# Altium PCB Monitor_Board.PcbDoc (part 4 of 5)
Units mil, origin at the board's own origin, x right, y up, seen from the top; angles counter-clockwise.
Board outline 3921.03 x 2556.03 mil, 4 copper layers (Top Layer, GND02, PWR03, Bottom Layer), stack 23.756 mil thick; 93 components, 142 nets, 522 pads, 264 vias.
Unrouted connection lines stored in the file: 39.
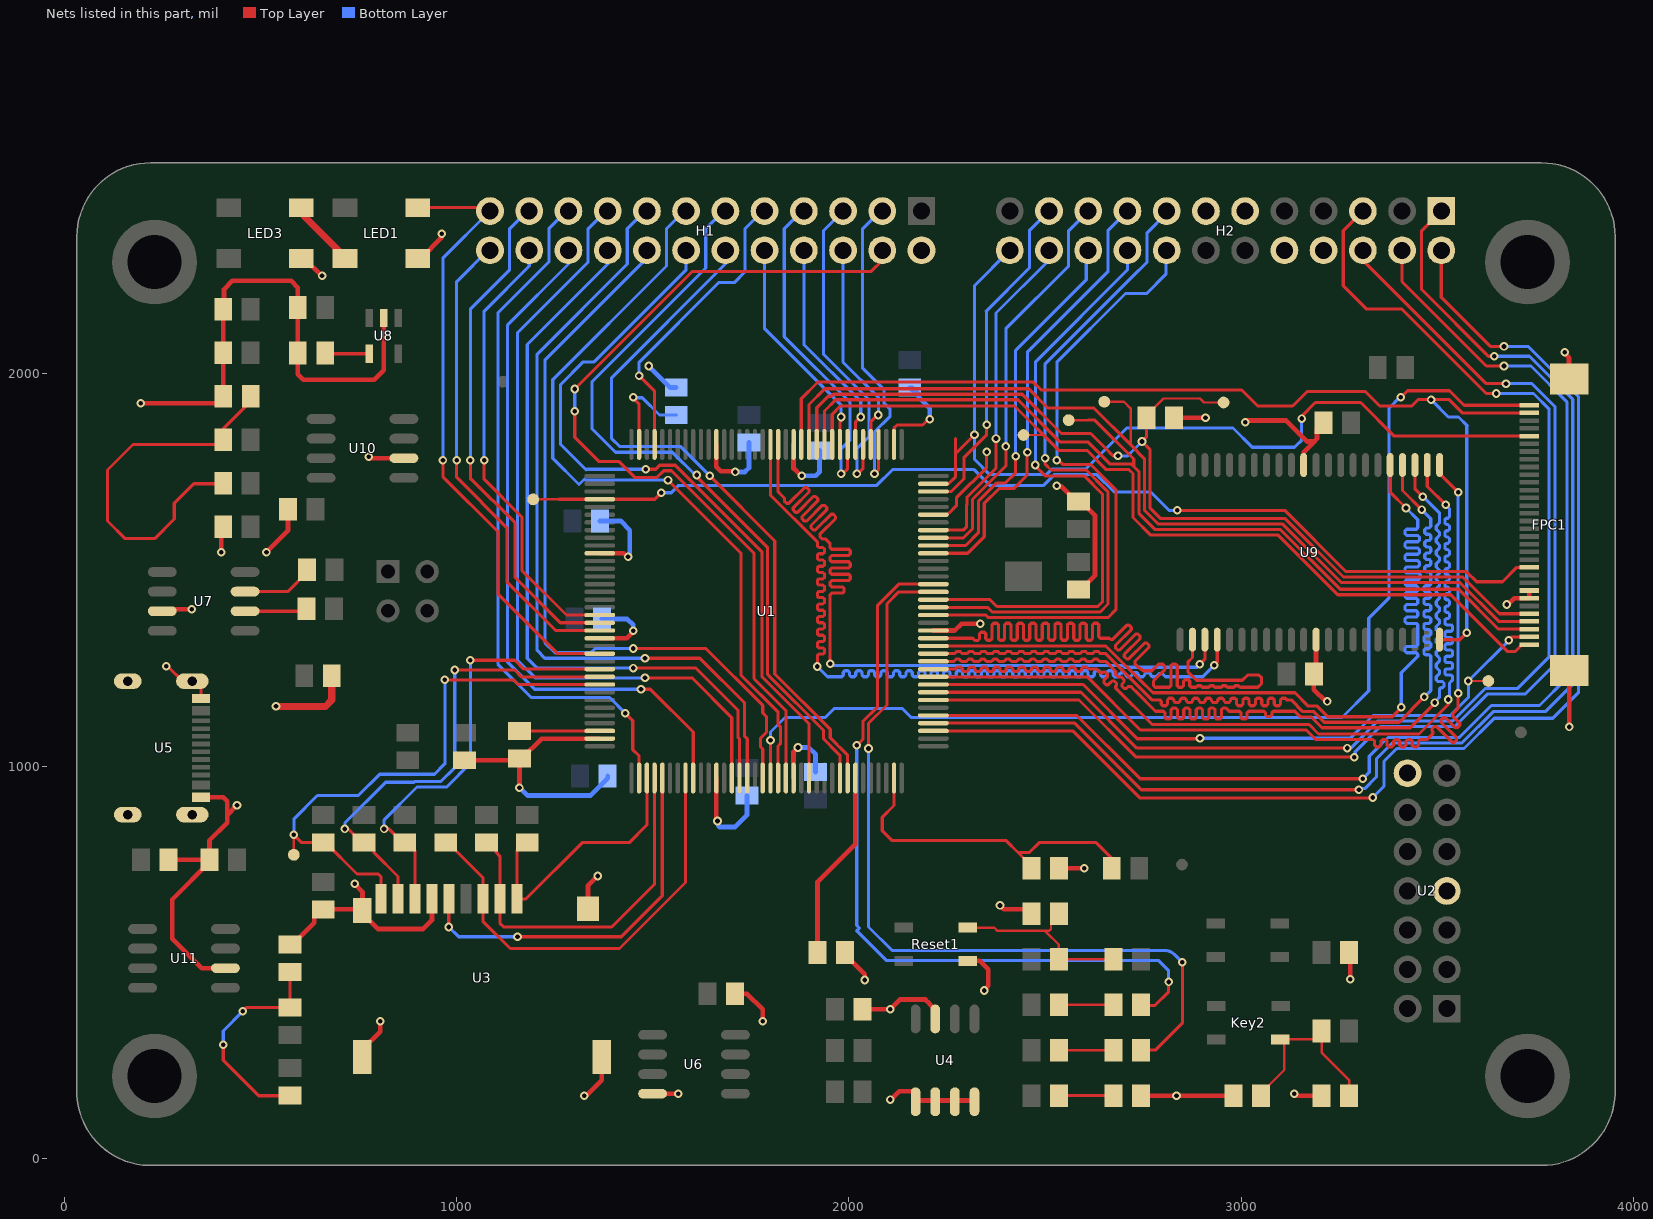
[diagram p5: the nets of this part, all layers, seen from the top]

## Via types
v1: diameter 22, hole 12, Top Layer to Bottom Layer, tented both sides, 259 vias
v2: diameter 45, hole 25, Top Layer to Bottom Layer, tented both sides, 4 vias
v3: diameter 22/22 (per signal layer), hole 12, Top Layer to Bottom Layer, tented both sides, 1 vias

## Nets (pads, with @x,y where several pads share a name; then routed paths per layer and width w, separated by ;. In a path a pad name is that pad's centre, name@x,y a point inside that pad or via, vN(x,y) a via of type N, cw(c..) or ccw(c..) an arc to the next point about the centre after c; other vN are vias at no path point) (continued)
GND: C1.1 C2.1 C3.2 C4.1 C5.2 C6.2 C7.1 C8.2 C9.1 C10.2 C11.2 C12.1 C13.1 C14.1 C15.1 C16.1 C17.1 C18.2 C19.1 C22.1 C23.1 C24.1 C25.1 C26.1 C27.1 C28.1 C29.2 C30.2 C31.1 C32.1 C33.1 D3.K FPC1.7 FPC1.8 FPC1.33 FPC1.34 H1.12 H2.8 H2.9 H2.18 H2.19 LED1.3 LED3.3 R2.2 R3.1 R4.1 R18.2 R22.1 Reset1.4 U1.16 U1.31 U1.38 U1.51 U1.61 U1.83 U1.94 U1.107 U1.120 U1.130 U2.7 U2.14 U3.6 U3.10 U3.11 U3.12 U3.13 U4.1 U4.2 U4.3 U4.4 U4.7 U5.1 U5.2 U5.3 U5.4 U5.A1-B12 U5.B1-A12 U6.4 U7.3 U8.2 U9.12 U9.34 U10.2 U11.2 | length 9278.5
  Top Layer w8: v1(260,1255) 263.02,1255 301.49,1216.53 U5.1@326.17,1216.53 333.91,1216.53 348.41,1202.04 U5.A1-B12@348.41,1172.45 ; U1.38@2114.8,1854.88 U1.38@2114.8,1820.2 2115.38,1820.78 2115.38,1862.38 2122.57,1869.57 2187.78,1869.57 2202.21,1884 v1(2206,1884) ; U1.31@2215.2,1641.06 2249.88,1641.06 2254.05,1645.24 2255.48,1645.24 2273.74,1663.5 2273.74,1683.74 2351,1761 v1(2351,1801)
  Top Layer w12: v1(195,1925) 400,1925 405,1930 C32.1@405,1943 405,2049.92 C22.1@404.92,2050 ; U7.3@249.39,1395 254.39,1400 v1(325,1400) ; C33.1@265,761.1 C30.2@369.96,761.1 369.96,811.06 415,856.1 415,875 ; U5.B1-A12@348.41,920.47 404.53,920.47 415,910 415,875 ; U5.A1-B12@365.26,1175.49 U5.A1-B12@365.75,1175.99 ; C30.2@374.7,765.85 374.7,759.74 275,660.04 275,560 350,485 U11.2@410.61,485 ; C17.1@399.96,1610 399.96,1555.04 400,1555 v1(400,1545) ; C22.1@404.92,2054 C31.1@404.92,2165 407,2167.08 407,2216 428,2237 578,2237 595,2220 C23.1@595,2169 594.92,2168.92 C24.1@594.92,2053 594.92,1999.08 609,1985 790,1985 814.09,2009.09 U8.2@814.09,2142.09 ; v1(440,900) 415,875 ; v1(515,1545) 569.92,1599.92 C29.2@569.92,1655 ; C28.1@575,545.08 581.1,545.08 637.06,601.04 637.06,618.09 653.9,634.92 C15.1@660,634.92 757.21,634.92 U3.10@759.89,632.24 ; LED3.3@604,2294.03 611.87,2294.03 655.91,2250 v1(657,2250) ; v1(740,700) 759.89,680.11 U3.10@759.89,632.24 ; U3.11@759.89,258.22 759.89,277.91 805,323.03 v1(805,350) ; v1(776.25,1788.75) 780,1785 U10.2@865.61,1785 ; LED1.3@900.52,2294.03 908.39,2294.03 962,2347.64 v1(962,2357) ; U3.6@937.05,661.78 937.05,607.05 915,585 799.26,585 759.89,624.37 U3.10@759.89,632.24 ; C19.1@1020,1015 1155.08,1015 C3.2@1160,1019.92 ; v1(1160,945) C3.2@1160,1019.92 ; v1(1325,160) 1330.23,160 1370.11,199.88 U3.12@1370.11,258.22 ; U1.107@1328.12,1069.62 1364.22,1069.62 U1.107@1364.8,1070.2 1216.38,1070.2 1166.1,1019.92 C3.2@1160,1019.92 ; U3.13@1334.68,636.18 1334.68,694.68 v1(1360,720) ; U1.94@1364.8,1326.1 1433.9,1326.1 1450,1342.2 v1(1450,1345) ; U1.83@1364.8,1542.64 1425.65,1542.64 1434.29,1534 v1(1437,1534) ; U6.4@1471.14,165 v1(1565,165) ; U1.120@1662.05,969.8 1662.05,862.95 v1(1665,860) ; U1.61@1662.05,1820.2 1662.05,1762.95 1673.09,1751.91 1708.09,1751.91 v1(1710,1750) ; C18.2@1710,420 1740,420 1780,380 v1(1780,350) ; U1.130@1858.9,969.8 1858.9,1036.4 v1(1870,1047.5) ; U1.51@1858.9,1820.2 1858.9,1758.9 1877.8,1740 v1(1880,1740) ; R3.1@1990.04,525 1990.04,518.9 2040,468.94 v1(2040,455) ; C14.1@2035,380 v1(2105,380) 2130,405 2195,405 2204.94,395.06 2204.94,394.36 2217.36,381.95 U4.7@2217.36,355 ; v1(2105,150) 2106.89,150 2128.04,171.15 2164.09,171.15 2170,165.24 U4.1@2170,147.64 ; U4.1@2170,144.39 U4.1@2170,147.64 ; U1.16@2215.2,1345.79 2269.79,1345.79 2287,1363 v1(2335,1363) ; Reset1.4@2302.96,503.59 2333.41,503.59 2355.09,481.91 2355.09,439.91 2345,429.83 v1(2345,428) ; U4.4@2320,147.64 U4.1@2170,147.64 ; v1(2385,645) 2395,635 C13.1@2454.92,635 ; v1(2530,1715) 2531.91,1713.09 2540.89,1713.09 2578.9,1675.08 C2.1@2585,1675.08 2591.1,1675.08 2627.34,1638.84 2627.34,1486.16 2591.1,1449.92 C1.1@2585,1449.92 ; R2.2@2535,740 v1(2600,740) ; D3.K@2745,160 v1(2835,160) C25.1@2980,160 ; R4.1@2829.04,1888 v1(2909.04,1888) ; v1(3010,1877) 3014,1881 3115,1881 3168.64,1827.36 3186,1827.36 ; v1(3135,165) 3140,160 R22.1@3205,160 ; U9.12@3159.25,1767.66 3159.25,1800.61 3186,1827.36 ; U9.34@3190.75,1322.34 3190.75,1240.75 C26.1@3185,1235 3185,1195 3215,1165 v1(3219,1165) ; C27.1@3209.92,1875 3193.09,1858.17 3193.09,1834.44 3186,1827.36 ; R18.2@3275.08,525 3278,522.08 v1(3278,457) ; v1(3677,1412) 3679.71,1412 3695.7,1428 FPC1.7@3734.31,1427.99 FPC1.8@3734.31,1447.68 ; v1(3825,2055) 3825,2051.21 3835.69,2040.52 FPC1.33@3835.69,1986.66 ; FPC1.34@3830,1237.66 FPC1.34@3835.69,1243.34 3836,1243.03 v1(3836,1100)
  Top Layer w18: v1(539.61,1152.39) 665.61,1152.39 681.53,1168.32 C16.1@681.53,1230.47
  Bottom Layer w12: v1(1160,945) 1161.01,945 1181.01,925 1341.1,925 1385,968.9 C4.1@1385,975 ; C6.2@1365,1625 1418.02,1625 1441.33,1601.69 1441.33,1538.33 v1(1437,1534) ; C7.1@1370.08,1375 1435,1375 1450,1360 v1(1450,1345) ; v1(1490,2020) 1545,1965 C12.1@1560,1965 ; v1(1665,860) 1666.91,858.09 1666.91,848.09 1670,845 1710,845 1740,875 C9.1@1740,925 ; v1(1710,1750) 1735,1750 1745,1760 C5.2@1745,1825 ; v1(1870,1047.5) 1897.5,1047.5 1915,1030 C8.2@1915,985.08 ; v1(1880,1740) 1915,1740 1925,1750 C11.2@1925,1804.92 ; C10.2@2170,1949.92 C10.2@2155,1964.92 2161.1,1964.92 2177.94,1948.09 2177.94,1940.06 2206,1912 v1(2206,1884)
LCD_A6: FPC1.31 U1.50 U9.44 | length 2792.5
  Top Layer w8: U1.50@1878.58,1820.2 1878.58,1936.58 1920,1978 1920,1979 2470,1979 2490,1959 3001,1959 3042,1918 3131,1918 3168,1955 3316,1955 3353,1918 3435,1918 3452,1935 3529,1935 3563.56,1900.43 FPC1.31@3734.31,1900.43 FPC1.31@3733.88,1900 ; U9.44@3505.71,1322.34 3557.34,1322.34 v1(3575,1340)
  Bottom Layer w8: v1(3484,1934) 3528,1890 3554,1890 3576,1868 3575,1867 v1(3575,1340)
LCD_BL: FPC1.11 TP9.1 U1.76 | length 2707.9
  Top Layer w6: 1217.5,1680 1225,1680 1239,1680 1245,1680 1260.57,1680 1261,1680.43
  Top Layer w8: 1261,1680.43 U1.76@1364.8,1680.43 1504.96,1680.43 v1(1521.53,1697) ; v1(2837,1652) 3111,1652 3267,1496 3574,1496 3600,1470 3666,1470 3702.73,1506.74 FPC1.11@3734.31,1506.74 FPC1.11@3736.22,1508.64
  Bottom Layer w8: v1(1521.53,1697) 1547,1697 1565,1715 2070,1715 2111,1756 2319,1756 2360,1715 2495,1715 2523,1743 2632,1743 2676,1699 2769,1699 2816,1652 v1(2837,1652)
LCD_CS: FPC1.2 TP5.1 U1.9 | length 1709
  Top Layer w8: U1.9@2215.2,1207.99 2597.01,1207.99 2735,1070 2894,1070 v1(2895,1071) ; v1(3682,1321) 3690.56,1329.57 FPC1.2@3734.31,1329.57
  Bottom Layer w8: v1(2895,1071) 3278,1071 3336,1129 3533,1129 3579,1175 v1(3579,1217) 3682,1320 v1(3682,1321)
LCD_MISO: FPC1.5 R4.2 TP8.1 U1.48 | length 2515.3
  Top Layer w6: R4.2@2758.96,1894.1 2801.86,1937 2895,1937 2905,1927
  Top Layer w8: U1.48@1917.95,1820.2 1917.95,1913.63 1947.32,1943 1955.37,1943 1960.37,1948 2442,1948 2542,1848 2616,1848 2662,1802 2666,1798 2673,1791 v1(2686,1791) ; R4.2@2758.96,1894.1 R4.2@2758.96,1888 2758.96,1839.96 2747,1828 v1(2747,1827.5) 2767,1807.5 2767,1658.8 2794.8,1631 3111.78,1631 3260.78,1482 3565,1482 3658.38,1388.62 FPC1.5@3734.31,1388.62 FPC1.5@3732.4,1390.53
  Bottom Layer w8: v1(2686,1791) 2710.5,1791 2717.5,1798 2721.5,1802 v1(2747,1827.5)
LCD_MOSI: FPC1.4 TP7.1 U1.49 | length 2394.8
  Top Layer w6: 2701,1929 2718,1912 2718,1819 2718,1817.88
  Top Layer w8: U1.49@1898.27,1820.2 1898.27,1921.78 1938.49,1962 2458,1962 2507,1913 2624,1913 2718,1819 2753,1784 2753,1653 2789,1617 3105.98,1617 3254.98,1468 3557,1468 3656.06,1368.93 FPC1.4@3734.31,1368.93
LCD_NE4: FPC1.32 U1.127 | length 2838.8
  Top Layer w8: U1.127@1799.84,969.8 1799.84,1065.84 v1(1800,1066) ; v1(3407,1940) 3424,1957 3531,1957 3567.89,1920.11 FPC1.32@3734.31,1920.11 FPC1.32@3733.87,1920.56
  Bottom Layer w8: v1(1800,1066) 1800,1087 1837,1124 1939.25,1124 1962.25,1147 2135.88,1147 2158.88,1124 3257,1124 3325,1192 3325,1377 3377,1429 3377,1913 3404,1940 v1(3407,1940)
LCD_PEN: FPC1.3 TP6.1 U1.47 | length 2374.1
  Top Layer w8: U1.47@1937.64,1820.2 1937.64,1905.47 1966.17,1934 2431,1934 2539,1826 2610,1826 2666,1770 2720,1770 2726,1764 ; 2610,1882 2627,1882 2726,1783 2726,1764 ; FPC1.3@3734.31,1349.26 3655.95,1349.26 3554.2,1451 3252.18,1451 3100.18,1603 2781,1603 2739,1645 2739,1751 2726,1764
LCD_RESET: FPC1.28 H2.1 U1.35 | length 2419.9
  Top Layer w8: U1.35@2215.2,1719.8 2253.8,1719.8 2272,1738 2272,1797 ; 2272,1835 2272,1797 ; v1(2320,1845) 2272,1797 ; v1(3154,1886) 3154,1892 3189,1927 3304.4,1927 3390.03,1841.38 FPC1.28@3734.31,1841.38 FPC1.28@3735.69,1840
  Bottom Layer w8: H2.1@2410,2315 2320,2225 v1(2320,1845) 2320,1782 2359,1743 2503.2,1743 2517.2,1757 2603,1757 2708,1862 2979,1862 3028,1813 3135.7,1813 3138.7,1816 3139,1816 3154,1831 v1(3154,1886)
LCD_SCK: FPC1.1 TP4.1 U1.46 | length 2195
  Top Layer w8: U1.46@1957.32,1820.2 1957.32,1897.32 1978,1918 2422,1918 2535,1805 2607,1805 2656,1756 2714,1756 2724,1746 2724,1634 2769,1589 3094.38,1589 3246.38,1437 3534,1437 3679,1292 3697.72,1292 3715.61,1309.89 FPC1.1@3734.31,1309.89
LED_0: D1.K U1.22 | length 1998
  Top Layer w8: v1(2020,1053) 2036,1069 2036,1114.8 2073,1151.8 2073,1410.01 2126.89,1463.9 U1.22@2215.2,1463.9 ; D1.K@2745,392 2747,390 2780,390 2815,425 v1(2815,450)
  Bottom Layer w8: v1(2020,1053) 2020,594 2027,587 2020,580 2095,505 2788.31,505 2815,478.31 v1(2815,450)
LED_1: D2.K U1.21 | length 2102.3
  Top Layer w8: v1(2050,1045) 2050,1109 2097,1156 2097,1414.21 2127,1444.21 U1.21@2215.2,1444.21 ; D2.K@2745,285 2754,276 2781,276 2850,345 v1(2850,500)
  Bottom Layer w8: v1(2050,1045) 2050,590 2110,530 2805,530 cw(c2805,493.79) 2830.61,519.39 v1(2850,500)
NetC3_1: C3.1 U1.106 | length 205.3
  Top Layer w8: C3.1@1160,1090 1160.7,1089.3 1364.22,1089.3 U1.106@1364.8,1089.88
NetC12_2: C12.2 U1.71 | length 254.8
  Top Layer w8: v1(1450,1940) 1450,1937.87 1465.2,1922.67 U1.71@1465.2,1820.2
  Bottom Layer w8: v1(1450,1940) 1451,1939 1473,1939 1517,1895 1559.92,1895 C12.2@1560,1894.92
NetC13_2: C13.2 R5.2 R6.1 Reset1.2 | length 506.9
  Top Layer w6: Reset1.2@2293.22,597.24 2303.02,587.45 2304.02,587.45 Reset1.2@2303.22,588.24 2370.76,588.24 2379,580 2500,580 ; C13.2@2535,624 2515.17,604.17 2515.17,585.17 2510,580 2500,580 ; R6.1@2674.92,508 R5.2@2535,508 2535,545 2500,580
NetC24_2: C24.2 U8.4 | length 112.4
  Top Layer w8: C24.2@665,2053 666.75,2051.25 U8.4@776.69,2051.25
NetC25_2: C25.2 Key2.4 R20.1 R22.2 | length 479.8
  Top Layer w6: C25.2@3050.08,160 3050.08,166.1 3110,226.02 3110,293.8 Key2.4@3100.2,303.59 ; Key2.4@3099.96,303.59 Key2.4@3100.2,303.59 ; R20.1@3205,325 R20.1@3205,323.43 ; R22.2@3275.08,160 3275.08,199.92 3205,270 R20.1@3205,323.43 ; Key2.4@3100.2,303.59 3185.17,303.59 R20.1@3205,323.43
NetC28_2: C28.2 R27.1 R29.2 | length 573.2
  Top Layer w8: v1(405,290) 405,250 495.08,159.92 R27.1@575,159.92 R27.1@581.1,159.92 ; v1(455,375) 465.08,385.08 R29.2@575,385.08 C28.2@575,475
  Bottom Layer w8: v1(405,290) 405,325 v1(455,375)
NetC32_2: C32.2 R28.1 R30.2 | length 985.9
  Top Layer w8: R28.1@404.92,1720 330,1720 280,1670 280,1630 230,1580 155,1580 110,1625 110,1755 175,1820 404.92,1820 404.92,1859.84 C32.2@475.08,1930
NetD1_A: D1.A R19.2 | length 147
  Top Layer w6: R19.2@2535,392 D1.A@2674.92,392
  Top Layer w8: D1.A@2669.92,410 D1.A@2674.92,405
NetD2_A: D2.A R21.2 | length 140.4
  Top Layer w6: R21.2@2535,276 2673.96,276 D2.A@2674.96,275
NetD3_A: D3.A R23.2 | length 139.9
  Top Layer w8: R23.2@2535,160 D3.A@2674.92,160
NetLED1_2: LED1.2 LED3.4 | length 179.4
  Top Layer w18: LED3.4@610.52,2434.97 610.52,2402.12 708.61,2304.03 LED1.2@716.48,2304.03
NetR1_1: R1.1 R2.1 U1.143 | length 860.9
  Top Layer w8: U1.143@2114.8,969.8 2114.8,899.8 2085,870 2085,835 2110,810 2401.02,810 2431.02,780 ; R2.1@2464.92,740 2464.92,746.1 2431.02,780 ; R1.1@2669.92,740 2669.92,765.08 2630,805 2485,805 2460,780 2431.02,780
NetR3_2: R3.2 U1.138 | length 484.7
  Top Layer w12: R3.2@1919.96,525 1919.96,704.96 2016.38,801.38 U1.138@2016.38,969.8
NetR15_1: R15.1 U7.7 | length 185.1
  Top Layer w8: U7.7@460.61,1445 569.02,1445 618.92,1494.9 R15.1@618.92,1501
NetR17_1: R17.1 U7.6 | length 156.4
  Top Layer w8: U7.6@460.61,1395 609.92,1395 R17.1@614.92,1390
PA_0: H2.14 U1.34 | length 864.7
  Top Layer w8: U1.34@2215.2,1700.12 2261.12,1700.12 2293,1732 2293,1786.61 2351,1844.61 v1(2351,1870)
  Bottom Layer w8: v1(2351,1870) 2351,2159 2350,2160 2460,2270 2460,2365 H2.14@2510,2415
PA_4: H1.23 U1.40 | length 821.1
  Top Layer w8: v1(2065,1745) 2075.43,1755.43 U1.40@2075.43,1820.2
  Bottom Layer w8: v1(2065,1745) 2065,1852 2105,1892 2105,1910 2089,1926 2089,1961 2071,1979 2070.44,1979 2035,2014.44 2035,2370 H1.23@2085,2420
PA_5: H1.10 U1.41 | length 546.5
  Top Layer w8: U1.41@2055.75,1820.2 2055.75,1878.28 2072.47,1895 v1(2075,1895)
  Bottom Layer w8: H1.10@1985,2320 1985,2030 2075,1940 v1(2075,1895)
PA_6: H1.22 U1.42 | length 839.2
  Top Layer w8: v1(2020.34,1745) 2022.12,1745 2036.06,1758.94 U1.42@2036.06,1820.2
  Bottom Layer w8: H1.22@1985,2420 H1.22@1985,2415 1935,2365 1935,2050 2051,1934 2051,1839.95 2020.34,1809.29 v1(2020.34,1745)
PA_7: H1.9 U1.43 | length 565.5
  Top Layer w8: U1.43@2016.38,1820.2 2016.38,1876.38 v1(2030,1890)
  Bottom Layer w8: H1.9@1885,2320 1885,2075 2025,1935 2030,1930 v1(2030,1890)
PA_15: H1.15 U1.110 | length 1791.1
  Top Layer w8: v1(1430,1135) 1448.94,1116.06 1448.94,1042.06 1465.2,1025.8 U1.110@1465.2,969.8
  Bottom Layer w8: H1.15@1285,2420 1235,2370 1235,2285 1105,2155 1105,1260 1190,1175 1390,1175 v1(1430,1135)
PB_6: H1.19 U1.136 | length 1940.6
  Top Layer w8: v1(1612.15,1742.15) 1612.15,1737.85 1792,1558 1792,1235 1797,1230 1797,1229.2 1935.5,1090.7 1935.5,1069.5 1938.4,1066.6 1955,1050 1955,1049.5 1975.5,1029 1976,1029 1977.01,1027.99 U1.136@1977.01,969.8
  Bottom Layer w8: v1(1612.15,1742.15) 1607.85,1742.15 1550,1800 1405,1800 1345,1860 1345,1980 1635,2270 1635,2370 H1.19@1685,2420
PB_7: H1.7 U1.137 | length 1810.6
  Top Layer w8: v1(1645,1740) 1811,1574 1811,1235 1952.4,1093.6 1952.4,1072.4 1969,1055.8 1969,1055.3 1981.3,1043 1981.8,1043 1996.69,1028.11 U1.137@1996.69,969.8
  Bottom Layer w8: v1(1645,1740) 1570,1815 1415,1815 1395,1835 1395,1990 1685,2280 H1.7@1685,2315 H1.7@1685,2320
PB_10: H1.20 U1.69 | length 772.2
  Top Layer w8: v1(1465,1995) 1504.57,1955.43 U1.69@1504.57,1820.2
  Bottom Layer w8: v1(1465,1995) 1465,2030 1667.5,2232.5 1707.5,2232.5 1735,2260 1735,2370 H1.20@1785,2420
PC_0: H2.16 U1.26 | length 1150.5
  Top Layer w8: U1.26@2215.2,1542.64 2302.64,1542.64 2345,1585 2345,1670 2382.5,1707.5 2420,1707.5 2454,1741.5 2454,1799 v1(2455,1800)
  Bottom Layer w8: v1(2455,1800) 2455,2055 2660,2260 2660,2365 H2.16@2710,2415
PC_1: H2.3 U1.27 | length 977.2
  Top Layer w8: U1.27@2215.2,1562.32 2297.32,1562.32 2330,1595 2330,1675 2377,1722 2399,1722 2425,1748 v1(2425,1790)
  Bottom Layer w8: v1(2425,1790) 2425,2060 2605,2240 2605,2310 H2.3@2610,2315
PC_2: H2.15 U1.28 | length 1041.5
  Top Layer w8: U1.28@2215.2,1582.01 2292.01,1582.01 2315,1605 2315,1680 2400,1765 v1(2400,1815)
  Bottom Layer w8: v1(2400,1815) 2400,2115 2560,2275 2560,2365 H2.15@2610,2415
PC_3: H2.2 U1.29 | length 880.2
  Top Layer w8: U1.29@2215.2,1601.69 2291.69,1601.69 2300,1610 2300,1665 2301,1666 2301,1685.8 2375,1759.8 v1(2375,1835)
  Bottom Layer w8: v1(2375,1835) 2375,2155 2510,2290 H2.2@2510,2315
PC_4: H1.21 U1.44 | length 858.9
  Top Layer w8: v1(1980,1745) 1983.38,1745 1996.69,1758.31 U1.44@1996.69,1820.2
  Bottom Layer w8: H1.21@1885,2420 1835,2370 1835,2095 2003,1927 2003,1832.12 1980,1809.12 v1(1980,1745)
PC_5: H1.8 U1.45 | length 581.8
  Top Layer w8: U1.45@1977.01,1820.2 1977.01,1877.01 1980,1880 v1(1980,1890)
  Bottom Layer w8: H1.8@1785,2320 1785,2115 1980,1920 v1(1980,1890)
PC_6: H1.13 LED1.4 U1.96 | length 1599.8
  Top Layer w8: LED1.4@900.52,2423.97 1076.03,2423.97 H1.13@1085,2415 ; v1(965,1780) 965,1738 1105,1598 1105,1439 1257.27,1286.73 U1.96@1364.8,1286.73
  Bottom Layer w8: v1(965,1780) 965,2295 H1.13@1085,2415 H1.13@1085,2420
PC_13: H2.10 U1.7 | length 3075.9
  Top Layer w8: U1.7@2215.2,1168.62 2586.38,1168.62 2732,1023 v1(3288,1023) ; H2.10@3310,2315 3310,2290 3625,1975 v1(3675,1975)
  Bottom Layer w8: v1(3288,1023) 3290.68,1025.68 3290.68,1036.98 3354.7,1101 3544.6,1101 3627.1,1183.5 3709.3,1183.5 3709.8,1184 3724,1184 3800,1260 3800,1916.21 3741.21,1975 v1(3675,1975)
PC_14: H2.22 U1.8 | length 3222.4
  Top Layer w8: U1.8@2215.2,1188.31 2591.69,1188.31 2734,1046 v1(3270,1046) ; H2.22@3310,2415 3260,2365 3260,2225 3320,2165 3410,2165 3625,1950 v1(3650,1950)
  Bottom Layer w8: v1(3270,1046) 3279,1046 3348,1115 3538.8,1115 3621.3,1197.5 3703.5,1197.5 3785,1279 3785,1910 3745,1950 v1(3650,1950)
PD_3: H1.3 U1.117 | length 1784
  Top Layer w8: v1(1470,1196.11) 1493.89,1196.11 1602.99,1087.01 U1.117@1602.99,969.8
  Bottom Layer w8: H1.3@1285,2320 H1.3@1285,2315 1285,2280 1130,2125 1130,1265 1200,1195 1201.11,1196.11 v1(1470,1196.11)
PD_6: H1.16 U1.122 | length 2006.1
  Top Layer w8: v1(1480,1225) 1600,1225 1701.42,1123.58 U1.122@1701.42,969.8
  Bottom Layer w8: H1.16@1385,2420 1335,2370 1335,2285 1155,2105 1155,1270 1200,1225 v1(1480,1225)
PD_7: H1.4 U1.123 | length 1896.5
  Top Layer w8: v1(1450,1250) 1610,1250 1716.8,1143.2 1716.8,1073.7 1721.1,1069.4 U1.123@1721.1,969.8
  Bottom Layer w8: H1.4@1385,2320 1385,2280 1180,2075 1180,1275 1205,1250 v1(1450,1250)
PE_4: H2.12 U1.3 | length 3192.3
  Top Layer w8: U1.3@2215.2,1089.88 2570.12,1089.88 2741,919 3334,919 v1(3335,920) ; H2.12@3510,2315 3510,2195 3635,2070 v1(3670,2070)
  Bottom Layer w8: v1(3335,920) 3364,949 3364,1012.27 3396.73,1045 3567.79,1045 3644.79,1122 3794,1122 3860,1188 3860,1941.07 3731.07,2070 v1(3670,2070)
PE_5: H2.24 U1.4 | length 3286.2
  Top Layer w8: U1.4@2215.2,1109.57 2575.43,1109.57 2745,940 v1(3300,940) ; H2.24@3510,2415 3460,2365 3460,2215 3630,2045 v1(3645,2045)
  Bottom Layer w8: v1(3300,940) 3302.68,942.68 3315.03,942.68 3345,972.65 3345,1019 3385,1059 3561.99,1059 3641.99,1139 3775,1139 3845,1209 3845,1934.85 3734.85,2045 v1(3645,2045)
PE_6: H2.11 U1.5 | length 3143.2
  Top Layer w8: U1.5@2215.2,1129.25 2580.75,1129.25 2732,978 2732.2,978 2742.2,968 v1(3310,968) ; H2.11@3410,2315 3410,2235 3625,2020 v1(3670,2020)
  Bottom Layer w8: v1(3310,968) 3326.5,984.5 3326.5,1025.5 3374,1073 3556.2,1073 3637.7,1154.5 3760.5,1154.5 3830,1224 3830,1928.64 3738.64,2020 v1(3670,2020)
PF_6: H2.5 U1.18 | length 1646.3
  Top Layer w8: U1.18@2215.2,1385.16 2348.84,1385.16 2355,1379 2365.4,1379 2646.03,1379 2661,1379 2680.5,1398.5 2680.5,1704.5 2615.8,1769.2 2544.59,1769.2 2533.79,1780 v1(2530,1780)
  Bottom Layer w8: v1(2530,1780) 2530,2030 2705,2205 2759,2205 2808,2254 2808,2313 H2.5@2810,2315
PF_7: H2.17 U1.19 | length 1708.2
  Top Layer w8: U1.19@2215.2,1404.84 2353.16,1404.84 2365,1393 2371.2,1393 2640.23,1393 2660.5,1413.27 2660.5,1699.3 2655,1704.8 2655,1705 2605,1755 2515,1755 2500,1770 v1(2500,1785)
  Bottom Layer w8: v1(2500,1785) 2500,2025.46 2719.54,2245 2720,2245 2760,2285 2760,2360 2810,2410 H2.17@2810,2415
PF_8: H2.4 U1.20 | length 1566.5
  Top Layer w8: U1.20@2215.2,1424.53 2359.47,1424.53 2377,1407 2634.43,1407 2646.5,1419.07 2646.5,1693.5 2600,1740 2500,1740 2475,1765 v1(2475,1767.65)
  Bottom Layer w8: v1(2475,1767.65) 2476,1768.65 2476,2031 2710,2265 H2.4@2710,2315
PG_6: H1.2 U1.91 | length 1154.4
  Top Layer w8: v1(1070,1780) 1070,1731 1166.5,1634.5 1166.5,1498.5 1279.84,1385.16 U1.91@1364.8,1385.16
  Bottom Layer w8: v1(1070,1780) 1070,2160 1185,2275 H1.2@1185,2315 H1.2@1185,2320
PG_7: H1.14 U1.92 | length 1312
  Top Layer w8: v1(1035,1780) 1035,1734 1149,1620 1149,1481 1264.53,1365.47 U1.92@1364.8,1365.47
  Bottom Layer w8: v1(1035,1780) 1035,2165 1135,2265 1135,2370 H1.14@1185,2420
PG_8: H1.1 U1.93 | length 1226.5
  Top Layer w8: v1(1000,1780) 1000,1736 1128,1608 1128,1470 1252.21,1345.79 U1.93@1364.8,1345.79
  Bottom Layer w8: v1(1000,1780) 1000,2235 H1.1@1085,2320
PG_9: H1.17 U1.124 | length 2019.5
  Top Layer w8: v1(1480,1275) 1620,1275 1734,1161 1734,1076.3 1740.79,1069.51 U1.124@1740.79,969.8
  Bottom Layer w8: v1(1480,1275) 1225,1275 1205,1295 1205,2050 1435,2280 1435,2370 H1.17@1485,2420
PG_11: H1.5 U1.126 | length 1941.2
  Top Layer w8: v1(1450,1300) 1635,1300 1780.16,1154.84 1780.16,1135.84 1790,1126 1790,1086.84 1774.47,1071.31 1774.47,1049.53 1780.16,1043.84 U1.126@1780.16,969.8
  Bottom Layer w8: v1(1450,1300) 1353.11,1300 1342.11,1289 1251,1289 1225,1315 1225,2035 1485,2295 H1.5@1485,2315 H1.5@1485,2320
PG_13: H1.18 U1.128 | length 1984.7
  Top Layer w8: v1(1538.75,1729.25) 1725,1543 1725,1232 1819.53,1137.47 1819.53,1106.53 1825.21,1100.85 1825.21,1057 1819.53,1051.32 U1.128@1819.53,969.8
  Bottom Layer w8: v1(1538.75,1729.25) 1328.75,1729.25 1326,1732 1312,1718 1245,1785 1245,1985 1535,2275 1535,2370 H1.18@1585,2420
PG_14: H1.11 U1.129 | length 2269.1
  Top Layer w8: v1(1301,1905) 1301,1838 1362,1777 1413,1777 1454,1736 1510.65,1736 1527.65,1753 1547.6,1753 1758,1542.6 1758,1223 1839.21,1141.79 U1.129@1839.21,969.8 ; v1(1301.2,1961.4) 1601.05,2261.25 2057.25,2261.25 2085,2289 H1.11@2085,2315
  Bottom Layer w8: v1(1301,1905) 1301,1961.2 v1(1301.2,1961.4) v1@1301.4,1961.6
PG_15: H1.6 U1.132 | length 1911.8
  Top Layer w8: v1(1482,1757) 1507.5,1757 1517.5,1767 1557.6,1767 1778,1546.6 1778,1228.4 1898.27,1108.13 U1.132@1898.27,969.8
  Bottom Layer w8: v1(1482,1757) 1332,1757 1330,1755 1265,1820 1265,1973 1322.5,2030.5 1350.5,2030.5 1585,2265 H1.6@1585,2315 H1.6@1585,2320
sdio_cmd: R9.1 U1.116 U3.3 | length 1124.5
  Top Layer w8: R9.1@972,805 978.1,805 1066.97,716.13 U3.3@1066.97,661.78 1066.97,605 1136.97,535 1415,535 1583.31,703.31 U1.116@1583.31,969.8
sdio_d0: R12.1 U1.98 U3.7 | length 1129.8
  Top Layer w8: v1(815,840) 826.9,840 861.9,805 R12.1@868,805 874.1,805 893.74,785.36 U3.7@893.74,661.78 ; v1(1035,1270) 1148.58,1270 1171.22,1247.36 U1.98@1364.8,1247.36
  Bottom Layer w8: v1(815,840) 815,863 899,947 975,947 1035,1007 v1(1035,1270)
sdio_d1: R13.1 U1.99 U3.8 | length 1225.4
  Top Layer w8: v1(715,840) 722.9,840 757.9,805 R13.1@764,805 770.1,805 788.94,786.17 788.94,780.06 850.43,718.57 U3.8@850.43,661.78 ; v1(995,1245) 1147.68,1245 1165,1227.68 U1.99@1364.8,1227.68
  Bottom Layer w8: v1(715,840) 715,855 819,959 891.2,959 893.2,961 959.9,961 995,996.1 995,1085.08 v1(995,1245)
sdio_d2: R7.1 U1.111 U3.1 | length 687
  Top Layer w8: R7.1@1180,805 1173.9,805 1153.59,784.69 U3.1@1153.59,661.78 1176.78,661.78 1320,805 1440,805 1485,850 1485,969.68 U1.111@1484.88,969.8
sdio_d3: R8.1 U1.112 U3.2 | length 937
  Top Layer w8: R8.1@1076,805 1082.1,805 1100.94,786.17 1100.94,780.06 1110.28,770.72 U3.2@1110.28,661.78 1110.28,599.72 1120,590 1395,590 1504.57,699.57 U1.112@1504.57,969.8
SDIO_DET: R14.1 TP1.1 U1.100 U3.9 | length 1419.8
  Top Layer w8: v1(585,825) 605,805 R14.1@660,805 666.1,805 746.1,725 800,725 807.12,717.88 U3.9@807.12,661.78 ; v1(970,1220) 1145,1220 1157.01,1207.99 U1.100@1364.8,1207.99
  Bottom Layer w8: v1(585,825) 585,865 645,925 749,925 803.5,979.5 943.5,979.5 970,1006 v1(970,1220)
SDIO_SCK: U1.113 U3.5 | length 970.3
  Top Layer w8: v1(980,590) 980,661.42 U3.5@980.36,661.78 ; v1(1155,565) 1420,565 1524.25,669.25 U1.113@1524.25,969.8
  Bottom Layer w8: v1(980,590) 1005,565 v1(1155,565)
SRAM_A0: U1.10 U9.1 | length 2385.8
  Top Layer w8: U1.10@2215.2,1227.68 2607.32,1227.68 2743,1092 2991.4,1092 3022.6,1092 3166,1092 3190,1068 3316,1068 3324,1068 3336,1068 3340,1064 3340,1053 3344,1049 3352,1049 3356,1053 3356,1064 3360,1068 3368,1068 3372,1064 3372,1053 3376,1049 3384,1049 3388,1053 3388,1064 3392,1068 3400,1068 3404,1064 3404,1053 3408,1049 3416,1049 3420,1053 3420,1064 3424,1068 3432,1068 3436,1064 3436,1053 3440,1049 3448,1049 3452,1053 3452,1064 3456,1068 3468,1068 3474,1068 3479.66,1073.66 3488.14,1082.14 3488.14,1087.8 3486.2,1089.74 3486.2,1095.4 3491.85,1101.06 3497.51,1101.06 3502.28,1096.28 3537.69,1060.88 3543.34,1060.88 3549,1066.54 3549,1072.19 3513.6,1107.6 3508.82,1112.37 3508.82,1118.03 3514.48,1123.68 3520.14,1123.68 3524.91,1118.91 3545.65,1098.17 3551.31,1098.17 3556.96,1103.83 3556.96,1109.49 3539.05,1127.4 3539.05,1133.05 3543.3,1137.3 3553,1147 v1(3553,1186) ; U9.1@3505.71,1767.66 3505.71,1745.62 3553,1698.33 v1(3553,1698)
  Bottom Layer w8: v1(3553,1186) 3553,1214.2 3553,1233.8 3553,1235 3553,1361.8 v1(3553,1698)
SRAM_A1: U1.11 U9.2 | length 2496.7
  Top Layer w8: U1.11@2215.2,1247.36 2265,1247.36 2271.31,1247.36 2273,1249.05 2277,1253.05 2285,1253.05 2289,1249.05 2289,1247.36 2289,1245.68 2293,1241.68 2301,1241.68 2305,1245.68 2305,1247.36 2305,1249.05 2309,1253.05 2317,1253.05 2321,1249.05 2321,1247.36 2321,1245.68 2325,1241.68 2333,1241.68 2337,1245.68 2337,1247.36 2337,1249.05 2341,1253.05 2349,1253.05 2353,1249.05 2353,1247.36 2353,1245.68 2357,1241.68 2365,1241.68 2369,1245.68 2369,1247.36 2369,1249.05 2373,1253.05 2381,1253.05 2385,1249.05 2385,1247.36 2385,1245.68 2389,1241.68 2397,1241.68 2401,1245.68 2401,1247.36 2401,1249.05 2405,1253.05 2413,1253.05 2417,1249.05 2417,1247.36 2417,1245.68 2421,1241.68 2429,1241.68 2433,1245.68 2433,1247.36 2433,1249.05 2437,1253.05 2445,1253.05 2449,1249.05 2449,1247.36 2449,1245.68 2453,1241.68 2461,1241.68 2465,1245.68 2465,1247.36 2465,1249.05 2469,1253.05 2477,1253.05 2481,1249.05 2481,1247.36 2481,1245.68 2485,1241.68 2493,1241.68 2497,1245.68 2497,1247.36 2497,1249.05 2501,1253.05 2509,1253.05 2513,1249.05 2513,1247.36 2513,1245.68 2517,1241.68 2525,1241.68 2529,1245.68 2529,1247.36 2529,1249.05 2533,1253.05 2541,1253.05 2545,1249.05 2545,1247.36 2545,1245.68 2549,1241.68 2557,1241.68 2561,1245.68 2561,1247.36 2561,1249.05 2565,1253.05 2573,1253.05 2577,1249.05 2577,1247.36 2577,1245.68 2581,1241.68 2589,1241.68 2593,1245.68 2593,1247.36 2593,1249.05 2597,1253.05 2605,1253.05 2609,1249.05 2610.69,1247.36 2625,1247.36 2628,1247.36 2631.64,1247.36 2638,1241 2640.83,1238.17 2646.49,1238.17 2648.03,1239.71 2653.69,1239.71 2659.34,1234.06 2659.34,1228.4 2654.97,1224.03 2649.8,1218.86 2649.8,1213.2 2655.46,1207.55 2661.11,1207.55 2666.28,1212.72 2670.66,1217.09 2676.31,1217.09 2681.97,1211.43 2681.97,1205.77 2680,1203.8 2680,1199 2773,1106 2997.2,1106 3016.8,1106 3173,1106 3197,1082 3453,1082 3528,1157 v1(3528,1170) ; U9.2@3474.21,1767.66 3474.21,1712.79 v1(3521,1666)
  Bottom Layer w8: v1(3521,1666) 3531,1656 3531,1648 3531,1636 3527,1632 3523,1632 3519,1628 3519,1620 3523,1616 3527,1616 3531,1612 3531,1604 3527,1600 3523,1600 3519,1596 3519,1588 3523,1584 3527,1584 3531,1580 3531,1572 3527,1568 3523,1568 3519,1564 3519,1556 3523,1552 3527,1552 3531,1548 3531,1540 3527,1536 3523,1536 3519,1532 3519,1524 3523,1520 3527,1520 3531,1516 3531,1508 3527,1504 3523,1504 3519,1500 3519,1492 3523,1488 3527,1488 3531,1484 3531,1476 3527,1472 3523,1472 3519,1468 3519,1460 3523,1456 3527,1456 3531,1452 3531,1444 3527,1440 3523,1440 3519,1436 3519,1428 3523,1424 3527,1424 3531,1420 3531,1412 3527,1408 3523,1408 3519,1404 3519,1396 3523,1392 3527,1392 3531,1388 3531,1380 3527,1376 3523,1376 3519,1372 3519,1364 3523,1360 3531,1360 3535,1360 3539,1356 3539,1348 3535,1344 3531,1344 3523,1344 3519,1340 3519,1332 3523,1328 3531,1328 3535,1328 3539,1324 3539,1316 3535,1312 3531,1312 3523,1312 3519,1308 3519,1300 3523,1296 3531,1296 3535,1296 3539,1292 3539,1284 3535,1280 3531,1280 3523,1280 3519,1276 3519,1268 3523,1264 3531,1264 3535,1264 3539,1260 3539,1252 3535,1248 3531,1248 3523,1248 3519,1244 3519,1236 3523,1232 3531,1232 3535,1232 3539,1228 3539,1220 3535,1216 3531,1212 3531,1203 3531,1192.79 3530.68,1192.47 3530.68,1172.68 v1(3528,1170)
SRAM_A2: U1.12 U9.3 | length 2477.2
  Top Layer w8: U1.12@2215.2,1267.05 2261,1267.05 2267.32,1267.05 2269,1268.73 2273,1272.73 2281,1272.73 2285,1268.73 2286.68,1267.05 2299.32,1267.05 2301,1268.73 2305,1272.73 2313,1272.73 2317,1268.73 2318.68,1267.05 2331.32,1267.05 2333,1268.73 2337,1272.73 2345,1272.73 2349,1268.73 2350.68,1267.05 2363.32,1267.05 2365,1268.73 2369,1272.73 2377,1272.73 2381,1268.73 2382.68,1267.05 2395.32,1267.05 2397,1268.73 2401,1272.73 2409,1272.73 2413,1268.73 2414.68,1267.05 2427.32,1267.05 2429,1268.73 2433,1272.73 2441,1272.73 2445,1268.73 2446.68,1267.05 2459.32,1267.05 2461,1268.73 2465,1272.73 2473,1272.73 2477,1268.73 2478.68,1267.05 2491.32,1267.05 2493,1268.73 2497,1272.73 2505,1272.73 2509,1268.73 2510.68,1267.05 2523.32,1267.05 2525,1268.73 2529,1272.73 2537,1272.73 2541,1268.73 2542.68,1267.05 2555.32,1267.05 2557,1268.73 2561,1272.73 2569,1272.73 2573,1268.73 2574.68,1267.05 2587.32,1267.05 2589,1268.73 2593,1272.73 2601,1272.73 2605,1268.73 2606.68,1267.05 2619.32,1267.05 2621,1268.73 2625,1272.73 2633,1272.73 2637,1268.73 2638.68,1267.05 2648,1267.05 2654.35,1267.05 2664.4,1257 2670.06,1251.34 2680.09,1241.31 2680.09,1238.74 2680.09,1233.09 2685.75,1227.43 2691.4,1227.43 2693.97,1227.43 2701.17,1220.23 2701.17,1214.57 2695.97,1209.37 2695.97,1203.71 2701.62,1198.06 2707.28,1198.06 2712.49,1203.26 2718.14,1203.26 2726.63,1194.77 2729.4,1192 2781.4,1140 2789.4,1140 2801.4,1140 2805.4,1136 2805.4,1124 2809.4,1120 2817.4,1120 2821.4,1124 2821.4,1140 2821.4,1144.03 2825.4,1148.03 2833.4,1148.03 2837.4,1144.03 2837.4,1140 2837.4,1124 2841.4,1120 2849.4,1120 2853.4,1124 2853.4,1140 2853.4,1144.03 2857.4,1148.03 2865.4,1148.03 2869.4,1144.03 2869.4,1140 2869.4,1124 2873.4,1120 2881.4,1120 2885.4,1124 2885.4,1140 2885.4,1144.03 2889.4,1148.03 2897.4,1148.03 2901.4,1144.03 2901.4,1140 2901.4,1124 2905.4,1120 2913.4,1120 2917.4,1124 2917.4,1140 2917.4,1144.03 2921.4,1148.03 2929.4,1148.03 2933.4,1144.03 2933.4,1140 2933.4,1124 2937.4,1120 2945.4,1120 2949.4,1124 2949.4,1140 2949.4,1144.03 2953.4,1148.03 2961.4,1148.03 2965.4,1144.03 ; 2965.4,1144 2969.4,1140 2975,1140 2983,1140 2995,1140 2999,1136 2999,1124 3003,1120 3011,1120 3015,1124 3015,1136 3019,1140 3031,1140 3038,1140 3046,1140 3058,1140 3062,1136 3062,1130.53 3066,1126.53 3074,1126.53 3078,1130.53 3078,1136 3082,1140 3096,1140 3136.4,1140 3151.4,1125 3179,1125 3206,1098 3431,1098 3493,1160 v1(3493,1162) ; U9.3@3442.72,1767.66 3442.72,1707.28 v1(3463,1687)
  Bottom Layer w8: v1(3463,1687) 3464,1687 3505,1646 3505,1629 3505,1619.79 3501,1615.79 3497,1611.79 3497,1603.79 3501,1599.79 3505,1595.79 3505,1587.79 3501,1583.79 3497,1579.79 3497,1571.79 3501,1567.79 3505,1563.79 3505,1555.79 3501,1551.79 3497,1547.79 3497,1539.79 3501,1535.79 3505,1531.79 3505,1523.79 3501,1519.79 3497,1515.79 3497,1507.79 3501,1503.79 3505,1499.79 3505,1491.79 3501,1487.79 3497,1483.79 3497,1475.79 3501,1471.79 3505,1467.79 3505,1459.79 3501,1455.79 3497,1451.79 3497,1443.79 3501,1439.79 3505,1435.79 3505,1427.79 3501,1423.79 3497,1419.79 3497,1411.79 3501,1407.79 3505,1403.79 3505,1395.79 3501,1391.79 3497,1387.79 3497,1379.79 3501,1375.79 3505,1371.79 3505,1363.79 3501,1359.79 3497,1355.79 3497,1347.79 3501,1343.79 3505,1339.79 3505,1331.79 3501,1327.79 3497,1323.79 3497,1315.79 3501,1311.79 3505,1307.79 3505,1299.79 3501,1295.79 3497,1291.79 3497,1283.79 3501,1279.79 3505,1275.79 3505,1267.79 3501,1263.79 3497,1259.79 3497,1251.79 3501,1247.79 3505,1243.79 3505,1235.79 3501,1231.79 3497,1227.79 3497,1219.79 3501,1215.79 3505,1215.79 3513,1215.79 3517,1211.79 3517,1203.79 3513,1199.79 3509,1199.79 3505,1195.79 3505,1183.79 3505,1175.79 v1(3493,1162)
SRAM_A3: U1.13 U9.4 | length 2476.7
  Top Layer w8: U1.13@2215.2,1286.73 2263,1286.73 2269.31,1286.73 2271,1288.42 2275,1292.42 2283,1292.42 2287,1288.42 2288.69,1286.73 2301.31,1286.73 2303,1288.42 2307,1292.42 2315,1292.42 2319,1288.42 2320.69,1286.73 2333.31,1286.73 2335,1288.42 2339,1292.42 2347,1292.42 2351,1288.42 2352.69,1286.73 2365.31,1286.73 2367,1288.42 2371,1292.42 2379,1292.42 2383,1288.42 2384.69,1286.73 2397.31,1286.73 2399,1288.42 2403,1292.42 2411,1292.42 2415,1288.42 2416.69,1286.73 2429.31,1286.73 2431,1288.42 2435,1292.42 2443,1292.42 2447,1288.42 2448.69,1286.73 2461.31,1286.73 2463,1288.42 2467,1292.42 2475,1292.42 2479,1288.42 2480.69,1286.73 2493.31,1286.73 2495,1288.42 2499,1292.42 2507,1292.42 2511,1288.42 2512.69,1286.73 2525.31,1286.73 2527,1288.42 2531,1292.42 2539,1292.42 2543,1288.42 2544.69,1286.73 2557.31,1286.73 2559,1288.42 2563,1292.42 2571,1292.42 2575,1288.42 2576.69,1286.73 2589.31,1286.73 2591,1288.42 2595,1292.42 2603,1292.42 2607,1288.42 2608.69,1286.73 2621.31,1286.73 2623,1288.42 2627,1292.42 2635,1292.42 2639,1288.42 2640.69,1286.73 2651,1286.73 2654.47,1286.73 2772.2,1169 2780.2,1169 2792.2,1169 2796.2,1165 2796.2,1158 2800.2,1154 2808.2,1154 2812.2,1158 2812.2,1169 2816.2,1173 2824.2,1173 2828.2,1169 2828.2,1166.03 2832.2,1162.03 2840.2,1162.03 2844.2,1166.03 2844.2,1169 2848.2,1173 2856.2,1173 2860.2,1169 2860.2,1166.03 2864.2,1162.03 2872.2,1162.03 2876.2,1166.03 2876.2,1169 2880.2,1173 2888.2,1173 2892.2,1169 2892.2,1166.03 2896.2,1162.03 2904.2,1162.03 2908.2,1166.03 2908.2,1169 2912.2,1173 2920.2,1173 2924.2,1169 2924.2,1166.03 2928.2,1162.03 2936.2,1162.03 2940.2,1166.03 2940.2,1169 2944.2,1173 2952.2,1173 2956.2,1169 2956.2,1166.03 2960.2,1162.03 2968.2,1162.03 2972.2,1166.03 2972.2,1169 2976.2,1173 2984.2,1173 2988.2,1169 2988.2,1158 2992.2,1154 3000.2,1154 3004.2,1158 3004.2,1169 3008.2,1173 3016.2,1173 3020.2,1169 3020.2,1158 3024.2,1154 3032.2,1154 3036.2,1158 3036.2,1169 3040.2,1173 3048.2,1173 3052.2,1169 3052.2,1158 3056.2,1154 3064.2,1154 3068.2,1158 3068.2,1169 3072.2,1173 3080.2,1173 3084.2,1169 3084.2,1158 3088.2,1154 3096.2,1154 3100.2,1158 3100.2,1169 3104.2,1173 3112.2,1173 3116.2,1169 3120,1169 3127.2,1169 3157.2,1139 3184.8,1139 3211.8,1112 3402.4,1112 v1(3466.9,1176.5) ; U9.4@3411.22,1767.66 3411.22,1702.78 v1(3460,1654)
  Bottom Layer w8: v1(3460,1654) 3483,1631 3483,1623 3483,1611 3479,1607 3471.81,1607 3467.81,1603 3467.81,1595 3471.81,1591 3479,1591 3483,1587 3483,1579 3479,1575 3471.81,1575 3467.81,1571 3467.81,1563 3471.81,1559 3479,1559 3483,1555 3483,1547 3479,1543 3471.81,1543 3467.81,1539 3467.81,1531 3471.81,1527 3479,1527 3483,1523 3483,1515 3479,1511 3471.81,1511 3467.81,1507 3467.81,1499 3471.81,1495 3479,1495 3483,1491 3483,1484 3483,1476 3483,1464 3479,1460 3469.47,1460 3465.47,1456 3465.47,1448 3469.47,1444 3479,1444 3483,1440 3483,1432 3479,1428 3469.47,1428 3465.47,1424 3465.47,1416 3469.47,1412 3479,1412 3483,1408 3483,1400 3479,1396 3469.47,1396 3465.47,1392 3465.47,1384 3469.47,1380 3479,1380 3483,1376 3483,1368 3479,1364 3469.47,1364 3465.47,1360 3465.47,1352 3469.47,1348 3479,1348 3483,1344 3483,1336 3479,1332 3469.47,1332 3465.47,1328 3465.47,1320 3469.47,1316 3479,1316 3483,1312 3483,1304 3479,1300 3469.47,1300 3465.47,1296 3465.47,1288 3469.47,1284 3479,1284 3483,1280 3483,1278 3483,1192.6 v1(3466.9,1176.5)
SRAM_A4: U1.14 U9.5 | length 2478.7
  Top Layer w8: U1.14@2215.2,1306.42 2654.58,1306.42 2755,1206 2756,1206 2775,1187 3137,1187 3171,1153 3194,1153 3221,1126 3385,1126 3408,1149 v1(3408,1150) ; U9.5@3379.72,1767.66 3379.72,1698.28 v1(3420,1658)
  Bottom Layer w8: v1(3408,1150) 3408,1238 3450,1280 3450,1285 3446,1289 3421.56,1289 3417.56,1293 3417.56,1301 3421.56,1305 3446,1305 3450,1309 3450,1321 3450,1337 3450,1345 3450,1348 3450,1360 3446,1364 3421.56,1364 3417.56,1368 3417.56,1376 3421.56,1380 3446,1380 3450,1384 3450,1392 3446,1396 3421.56,1396 3417.56,1400 3417.56,1408 3421.56,1412 3446,1412 3450,1416 3450,1424 3446,1428 3421.56,1428 3417.56,1432 3417.56,1440 3421.56,1444 3446,1444 3450,1448 3450,1456 3446,1460 3421.56,1460 3417.56,1464 3417.56,1472 3421.56,1476 3450,1476 3452.45,1476 3456.45,1480 3456.45,1488 3452.45,1492 3450,1492 3421.56,1492 3417.56,1496 3417.56,1504 3421.56,1508 3450,1508 3454,1512 3454,1520 3450,1524 3421.56,1524 3417.56,1528 3417.56,1536 3421.56,1540 3450,1540 3454,1544 3454,1552 3450,1556 3421.56,1556 3417.56,1560 3417.56,1568 3421.56,1572 3450,1572 3454,1576 3454,1584 3450,1588 3421.56,1588 3417.56,1592 3417.56,1600 3421.56,1604 3446,1604 3450,1608 3450,1620 3450,1628 v1(3420,1658)
SRAM_A5: U1.15 U9.24 | length 2507.6
  Top Layer w8: U1.15@2215.2,1326.1 2273,1326.1 2281,1326.1 2292.9,1326.1 2300.9,1326.1 2315.22,1326.1 2316.9,1324.42 2320.9,1320.42 2328.9,1320.42 2332.9,1324.42 2332.9,1326.1 2332.9,1337.41 2336.9,1341.41 2344.9,1341.41 2348.9,1337.41 2348.9,1326.1 2348.9,1325.1 2352.9,1321.1 2360.9,1321.1 2364.9,1325.1 2364.9,1326.1 2364.9,1360.32 2368.9,1364.32 2376.9,1364.32 2380.9,1360.32 2380.9,1326.1 2380.9,1325.1 2384.9,1321.1 2392.9,1321.1 2396.9,1325.1 2396.9,1326.1 2396.9,1360.32 2400.9,1364.32 2408.9,1364.32 2412.9,1360.32 2412.9,1326.1 2412.9,1325.1 2416.9,1321.1 2424.9,1321.1 2428.9,1325.1 2428.9,1326.1 2428.9,1360.32 2432.9,1364.32 2440.9,1364.32 2444.9,1360.32 2444.9,1326.1 2444.9,1325.1 2448.9,1321.1 2456.9,1321.1 2460.9,1325.1 2460.9,1326.1 2460.9,1360.32 2464.9,1364.32 2472.9,1364.32 2476.9,1360.32 2476.9,1326.1 2476.9,1325.1 2480.9,1321.1 2488.9,1321.1 2492.9,1325.1 2492.9,1326.1 2492.9,1360.32 2496.9,1364.32 2504.9,1364.32 2508.9,1360.32 2508.9,1326.1 2508.9,1325.1 2512.9,1321.1 2520.9,1321.1 2524.9,1325.1 2524.9,1326.1 2524.9,1360.32 2528.9,1364.32 2536.9,1364.32 2540.9,1360.32 2540.9,1326.1 2540.9,1325.1 2544.9,1321.1 2552.9,1321.1 2556.9,1325.1 2556.9,1326.1 2556.9,1360.32 2560.9,1364.32 2568.9,1364.32 2572.9,1360.32 2572.9,1326.1 2572.9,1325.1 2576.9,1321.1 2584.9,1321.1 2588.9,1325.1 2588.9,1326.1 2588.9,1360.32 2592.9,1364.32 2600.9,1364.32 2604.9,1360.32 2604.9,1326.1 2604.9,1325.1 2608.9,1321.1 2616.9,1321.1 2620.9,1325.1 2620.9,1326.1 2620.9,1360.32 2624.9,1364.32 2632.9,1364.32 2636.9,1360.32 2636.9,1330.1 2640.9,1326.1 2654,1326.1 2661,1326.1 2663.9,1326.1 2666.73,1323.27 2672.39,1323.27 2708.45,1359.33 2714.1,1359.33 2719.76,1353.68 2719.76,1348.02 2680.87,1309.13 2679.1,1307.36 2679.1,1301.7 2684.75,1296.04 2690.41,1296.04 2692.18,1297.82 2731.08,1336.71 2736.73,1336.71 2742.39,1331.05 2742.39,1325.39 2703.5,1286.5 2701.73,1284.73 2701.73,1279.07 2707.38,1273.42 2713.04,1273.42 2714.81,1275.19 2753.7,1314.08 2759.36,1314.08 2765.02,1308.42 2765.02,1302.77 2728.95,1266.7 2728.95,1261.05 2737.44,1252.56 2750.22,1243.28 2772.28,1243.28 2789,1260 2800,1260 2805,1255 2805,1246 2776.4,1217.4 2776.4,1205.4 2780.8,1201 2788.8,1201 2804.8,1201 2816.8,1201 2820.8,1205 2820.8,1256 2824.8,1260 2832.8,1260 2836.8,1256 2836.8,1205 2840.8,1201 2848.8,1201 2852.8,1205 2852.8,1216.4 2856.8,1220.4 2864.8,1220.4 2868.8,1216.4 2868.8,1205 2872.8,1201 2884.8,1201 2888.8,1205 2896.8,1205 2900.8,1201 2916.8,1201 2920.8,1205 2928.8,1205 2932.8,1201 2948.8,1201 2952.8,1205 2960.8,1205 2964.8,1201 2980.8,1201 2984.8,1205 2992.8,1205 2996.8,1201 3012.8,1201 3028.8,1201 3042.26,1201 3052,1210.74 3052,1225.3 3045.15,1232.15 3037.15,1232.15 3021.15,1232.15 3015.95,1232.15 3002.8,1219 2886,1219 2864,1241 2864,1265 2875.79,1276.79 U9.24@2875.79,1322.34
SRAM_A7: U1.53 U9.25 | length 2458.7
  Top Layer w8: U1.53@1819.53,1820.2 1819.53,1699.47 1825.19,1693.82 1835.3,1683.7 1835.3,1681.31 1835.3,1675.65 1840.96,1669.99 1846.62,1669.99 1847.81,1671.19 1886.71,1710.08 1892.36,1710.08 1898.02,1704.42 1898.02,1698.76 1859.13,1659.87 1857.93,1658.68 1857.93,1653.02 1863.59,1647.36 1869.25,1647.36 1870.44,1648.56 1909.33,1687.45 1914.99,1687.45 1920.65,1681.79 1920.65,1676.14 1881.76,1637.25 1880.56,1636.05 1880.56,1630.39 1886.22,1624.74 1891.87,1624.74 1893.07,1625.93 1931.96,1664.82 1937.62,1664.82 1943.27,1659.17 1943.27,1653.51 1904.38,1614.62 1903.19,1613.42 1903.19,1607.77 1908.84,1602.11 1914.5,1602.11 1915.7,1603.31 1954.59,1642.2 1960.24,1642.2 1965.9,1636.54 1965.9,1630.88 1927.01,1591.99 1925.81,1590.8 1925.81,1585.14 1931.47,1579.48 1937.13,1579.48 1939.52,1579.48 1949.64,1569.36 1952,1567 1952,1561 1952,1557 1956,1553 1999.42,1553 2003.42,1549 2003.42,1541 1999.42,1537 1956,1537 1952,1533 1952,1525 1956,1521 1999.42,1521 2003.42,1517 2003.42,1509 1999.42,1505 1956,1505 1952,1501 1952,1493 1956,1489 1999.42,1489 2003.42,1485 2003.42,1477 1999.42,1473 1956,1473 1952,1469 1952,1461 1956,1457 1983.62,1457 1987.62,1453 1987.62,1445 1983.62,1441 1956,1441 1952,1437 1952,1436 v1(1952,1261) ; v1(2894.61,1259.39) 2907.28,1272.07 U9.25@2907.28,1322.34
  Bottom Layer w8: v1(1952,1261) 1956,1257 2698.13,1257 2703.13,1252 2887.21,1252 v1(2894.61,1259.39)
SRAM_A8: U1.54 U9.26 | length 2459.9
  Top Layer w8: U1.54@1799.84,1820.2 1799.84,1691.32 1919.5,1571.66 1919.5,1565.5 1919.5,1561.5 1923.5,1557.5 1934,1557.5 1938,1553.5 1938,1545.5 1934,1541.5 1923.5,1541.5 1919.5,1537.5 1919.5,1529.5 1923.5,1525.5 1934,1525.5 1938,1521.5 1938,1513.5 1934,1509.5 1923.5,1509.5 1919.5,1505.5 1919.5,1497.5 1923.5,1493.5 1934,1493.5 1938,1489.5 1938,1481.5 1934,1477.5 1923.5,1477.5 1919.5,1473.5 1919.5,1465.5 1923.5,1461.5 1934,1461.5 1938,1457.5 1938,1449.5 1934,1445.5 1923.5,1445.5 1919.5,1441.5 1919.5,1433.5 1923.5,1429.5 1934,1429.5 1938,1425.5 1938,1417.5 1934,1413.5 1923.5,1413.5 1919.5,1409.5 1919.5,1401.5 1923.5,1397.5 1934,1397.5 1938,1393.5 1938,1385.5 1934,1381.5 1923.5,1381.5 1919.5,1377.5 1919.5,1369.5 1923.5,1365.5 1934,1365.5 1938,1361.5 1938,1353.5 1934,1349.5 1923.5,1349.5 1919.5,1345.5 1919.5,1337.5 1923.5,1333.5 1934,1333.5 1938,1329.5 1938,1321.5 1934,1317.5 1923.5,1317.5 1919.5,1313.5 1919.5,1305.5 1923.5,1301.5 1934,1301.5 1938,1297.5 1938,1289.5 1934,1285.5 1923.5,1285.5 1919.5,1281.5 1919.5,1270 v1(1919.5,1254) ; v1(2931,1257) 2938.78,1264.78 U9.26@2938.78,1322.34
  Bottom Layer w8: v1(1919.5,1254) 1945.5,1228 1953.5,1228 1969.5,1228 1981.5,1228 1985.5,1232 1985.5,1239 1989.5,1243 1997.5,1243 2001.5,1239 2001.5,1232 2005.5,1228 2013.5,1228 2017.5,1232 2017.5,1239 2021.5,1243 2029.5,1243 2033.5,1239 2033.5,1232 2037.5,1228 2045.5,1228 2049.5,1232 2049.5,1239 2053.5,1243 2061.5,1243 2065.5,1239 2065.5,1232 2069.5,1228 2077.5,1228 2081.5,1232 2081.5,1239 2085.5,1243 2093.5,1243 2097.5,1239 2097.5,1232 2101.5,1228 2109.5,1228 2113.5,1232 2113.5,1239 2117.5,1243 2125.5,1243 2129.5,1239 2129.5,1232 2133.5,1228 2141.5,1228 2145.5,1232 2145.5,1239 2149.5,1243 2157.5,1243 2161.5,1239 2161.5,1232 2165.5,1228 2173.5,1228 2177.5,1232 2177.5,1239 2181.5,1243 2189.5,1243 2193.5,1239 2193.5,1232 2197.5,1228 2205.5,1228 2209.5,1232 2209.5,1239 2213.5,1243 2221.5,1243 2225.5,1239 2225.5,1232 2229.5,1228 2237.5,1228 2241.5,1232 2241.5,1239 2245.5,1243 2253.5,1243 2257.5,1239 2257.5,1232 2261.5,1228 2269.5,1228 2273.5,1232 2273.5,1239 2277.5,1243 2285.5,1243 2289.5,1239 2289.5,1232 2293.5,1228 2301.5,1228 2305.5,1232 2305.5,1239 2309.5,1243 2317.5,1243 2321.5,1239 2321.5,1232 2325.5,1228 2333.5,1228 2337.5,1232 2337.5,1239 2341.5,1243 2349.5,1243 2353.5,1239 2353.5,1232 2357.5,1228 2365.5,1228 2369.5,1232 2369.5,1239 2373.5,1243 2381.5,1243 2385.5,1239 2385.5,1232 2389.5,1228 2397.5,1228 2401.5,1232 2401.5,1239 2405.5,1243 2413.5,1243 2417.5,1239 2417.5,1232 2421.5,1228 2429.5,1228 2433.5,1232 2433.5,1239 2437.5,1243 2445.5,1243 2449.5,1239 2449.5,1232 2453.5,1228 2461.5,1228 2465.5,1232 2465.5,1239 2469.5,1243 2477.5,1243 2481.5,1239 2481.5,1232 2485.5,1228 2493.5,1228 2497.5,1232 2497.5,1239 2501.5,1243 2509.5,1243 2513.5,1239 2513.5,1232 2517.5,1228 2525.5,1228 2529.5,1232 2529.5,1239 2533.5,1243 2541.5,1243 2545.5,1239 2545.5,1232 2549.5,1228 2557.5,1228 2561.5,1232 2561.5,1239 2565.5,1243 2573.5,1243 2577.5,1239 2577.5,1232 2581.5,1228 2589.5,1228 2593.5,1232 2593.5,1239 2597.5,1243 2605.5,1243 2609.5,1239 2609.5,1232 2613.5,1228 2621.5,1228 2625.5,1232 2625.5,1239 2629.5,1243 2637.5,1243 2641.5,1239 2641.5,1232 2645.5,1228 2653.5,1228 2657.5,1232 2657.5,1239 2661.5,1243 2669.5,1243 2673.5,1239 2673.5,1232 2677.5,1228 2685.5,1228 2689.5,1232 2689.5,1234.1 2693.5,1238.1 2701.5,1238.1 2705.5,1234.1 2705.5,1232 2709.5,1228 2717.5,1228 2721.5,1232 2721.5,1234 2725.5,1238 2733.5,1238 2737.5,1234 2737.5,1232 2741.5,1228 2749.5,1228 2753.5,1232 2753.5,1234 2757.5,1238 2765.5,1238 2769.5,1234 2769.5,1232 2773.5,1228 2779,1228 2783,1228 2787,1232 2791,1236 2799,1236 2803,1232 2807,1228 2822,1228 2902,1228 v1(2931,1257)